# Altium PCB PCB1.PcbDoc (part 12 of 12)
Units mm, origin at the board's own origin, x right, y up, seen from the top; angles counter-clockwise.
Board outline 122.17 x 121.67 mm, 2 copper layers (Top Layer, Bottom Layer); 274 components, 225 nets, 941 pads, 421 vias.
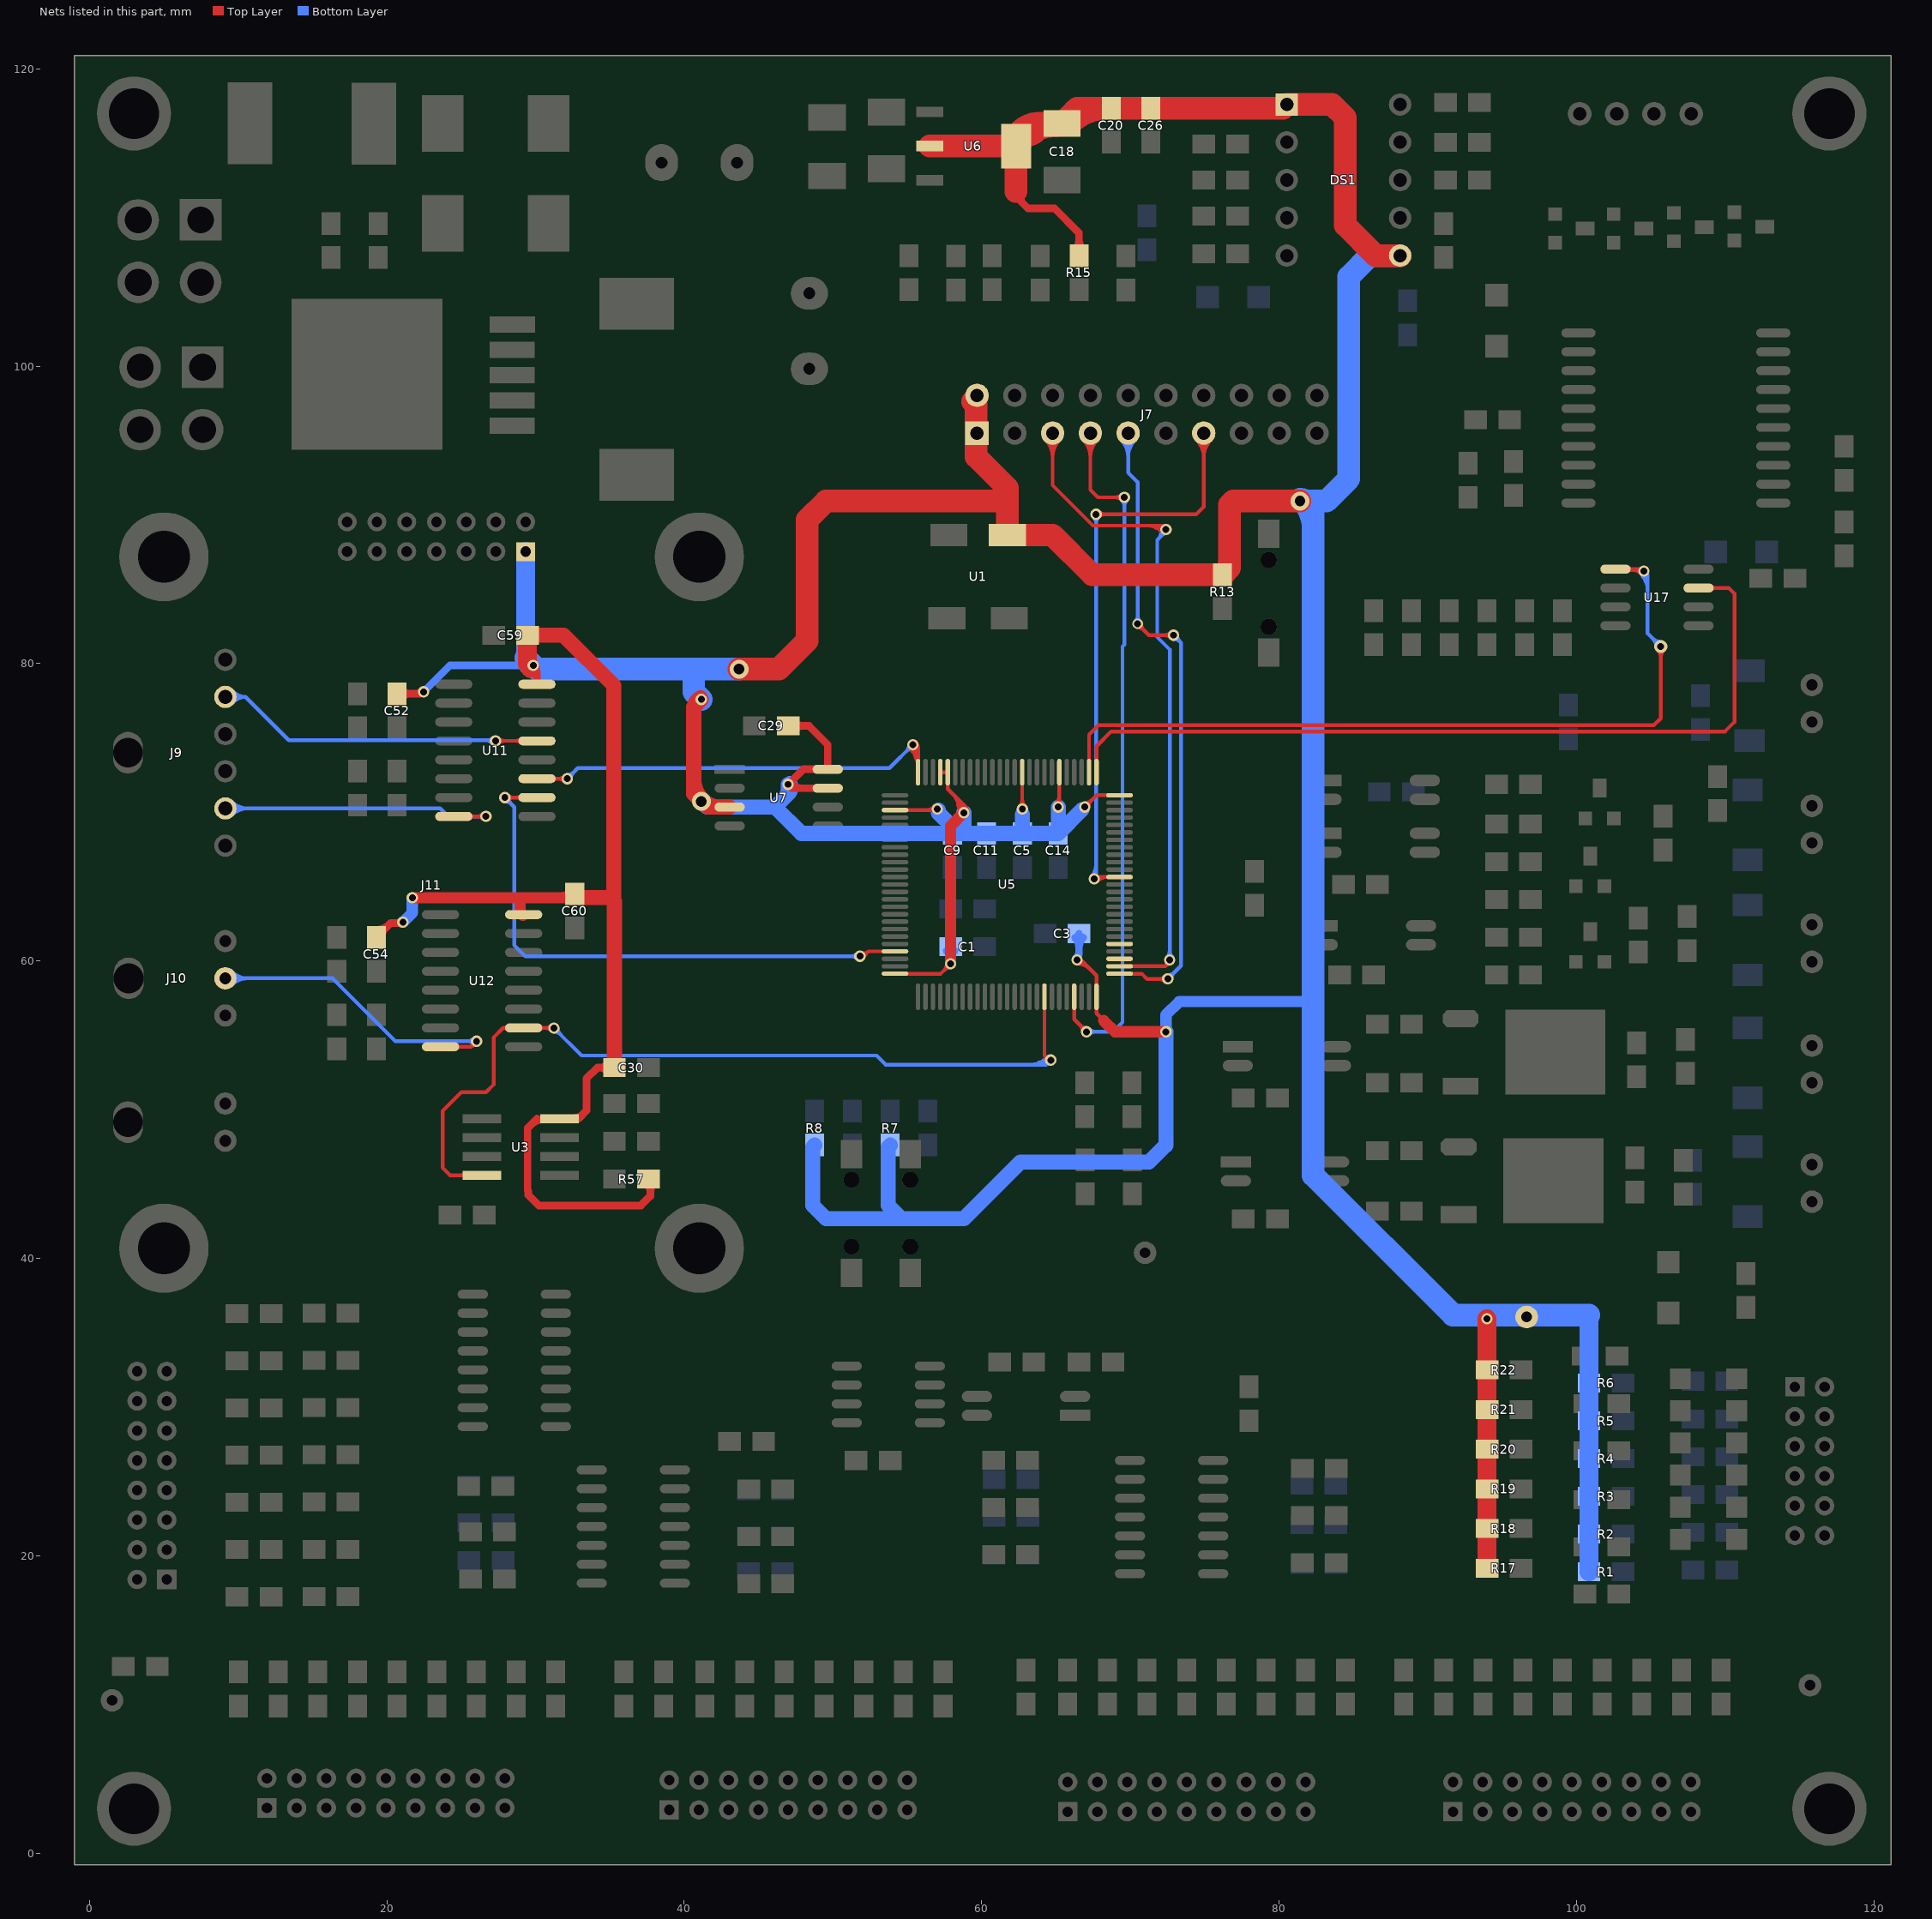
[diagram p12: the nets of this part, all layers, seen from the top]

## Via types
v1: diameter 0.762, hole 0.457, Top Layer to Bottom Layer, 339 vias
v2: diameter 1.27, hole 0.457, Top Layer to Bottom Layer, 39 vias
v3: diameter 0.889, hole 0.457, Top Layer to Bottom Layer, 21 vias
v4: diameter 1.27, hole 0.711, Top Layer to Bottom Layer, 12 vias
v5: diameter 1.524, hole 0.711, Top Layer to Bottom Layer, 5 vias
v6: diameter 1.016, hole 0.457, Top Layer to Bottom Layer, 3 vias
v7: diameter 0.711, hole 0.457, Top Layer to Bottom Layer, 1 vias
v8: diameter 1.524, hole 0.457, Top Layer to Bottom Layer, 1 vias

## Nets (pads, with @x,y where several pads share a name; then routed paths per layer and width w, separated by ;. In a path a pad name is that pad's centre, name@x,y a point inside that pad or via, vN(x,y) a via of type N, cw(c..) or ccw(c..) an arc to the next point about the centre after c; other vN are vias at no path point) (continued)
TCK: J7.9 U5.76 | length 86.5
  Top Layer w0.254: U5.76@69.272,59.151 70.77,59.151 71.12,58.801 v1(72.517,58.801) ; v7(70.485,82.677) 71.247,81.915 v1(72.898,81.915) ; v7@70.46,82.672 ccw(c70.831,82.748) 70.733,82.382 ; v7@70.46,82.672 ccw(c70.831,82.748) 70.733,82.382 ; v7@70.46,82.672 ccw(c70.831,82.748) 70.733,82.382 ; v7@70.46,82.672 ccw(c70.831,82.748) 70.733,82.382 ; v7@70.46,82.672 ccw(c70.831,82.748) 70.733,82.382 ; v7@70.46,82.672 ccw(c70.831,82.748) 70.733,82.382 ; v7@70.485,82.448 cw(c70.485,81.897) 70.875,82.287 ; v7@70.485,82.448 cw(c70.485,81.897) 70.875,82.287 ; v7@70.485,82.448 cw(c70.485,81.897) 70.875,82.287 ; v7@70.485,82.448 cw(c70.485,81.897) 70.875,82.287 ; v7@70.49,82.702 cw(c70.414,82.331) 70.78,82.429 ; v7@70.49,82.702 cw(c70.414,82.331) 70.78,82.429 ; v7@70.49,82.702 cw(c70.414,82.331) 70.78,82.429 ; v7@70.49,82.702 cw(c70.414,82.331) 70.78,82.429 ; v7@70.49,82.702 cw(c70.414,82.331) 70.78,82.429 ; v7@70.49,82.702 cw(c70.414,82.331) 70.78,82.429 ; v7@70.714,82.677 ccw(c71.265,82.677) 70.875,82.287 ; v7@70.714,82.677 ccw(c71.265,82.677) 70.875,82.287 ; v7@70.714,82.677 ccw(c71.265,82.677) 70.875,82.287 ; v7@70.714,82.677 ccw(c71.265,82.677) 70.875,82.287 ; 71.904,58.801 cw(c71.904,58.188) v1@72.337,58.621 ; 71.904,58.801 ccw(c71.904,59.414) v1@72.337,58.981 ; 71.904,58.801 cw(c71.904,58.188) v1@72.337,58.621 ; 71.904,58.801 ccw(c71.904,59.414) v1@72.337,58.981 ; 71.904,58.801 cw(c71.904,58.188) v1@72.337,58.621 ; 71.904,58.801 ccw(c71.904,59.414) v1@72.337,58.981 ; 71.904,58.801 cw(c71.904,58.188) v1@72.337,58.621 ; 71.904,58.801 ccw(c71.904,59.414) v1@72.337,58.981 ; 72.285,81.915 cw(c72.285,81.302) v1@72.718,81.735 ; 72.285,81.915 ccw(c72.285,82.528) v1@72.718,82.095 ; 72.285,81.915 cw(c72.285,81.302) v1@72.718,81.735 ; 72.285,81.915 ccw(c72.285,82.528) v1@72.718,82.095 ; 72.285,81.915 cw(c72.285,81.302) v1@72.718,81.735 ; 72.285,81.915 ccw(c72.285,82.528) v1@72.718,82.095 ; 72.285,81.915 cw(c72.285,81.302) v1@72.718,81.735 ; 72.285,81.915 ccw(c72.285,82.528) v1@72.718,82.095
  Bottom Layer w0.254: J7.9@69.85,95.504 69.85,92.837 70.485,92.202 v7(70.485,82.677) ; v1(72.517,58.801) 73.406,59.69 73.406,81.407 v1(72.898,81.915) ; J7.9@69.383,95.037 cw(c68.256,93.91) 69.85,93.91 ; J7.9@69.383,95.037 cw(c68.256,93.91) 69.85,93.91 ; J7.9@69.383,95.037 cw(c68.256,93.91) 69.85,93.91 ; J7.9@69.383,95.037 cw(c68.256,93.91) 69.85,93.91 ; J7.9@69.563,95.217 cw(c68.869,94.523) 69.85,94.523 ; J7.9@69.563,95.217 cw(c68.869,94.523) 69.85,94.523 ; J7.9@69.563,95.217 cw(c68.869,94.523) 69.85,94.523 ; J7.9@69.563,95.217 cw(c68.869,94.523) 69.85,94.523 ; 69.85,93.91 cw(c71.444,93.91) J7.9@70.317,95.037 ; 69.85,93.91 cw(c71.444,93.91) J7.9@70.317,95.037 ; 69.85,93.91 cw(c71.444,93.91) J7.9@70.317,95.037 ; 69.85,93.91 cw(c71.444,93.91) J7.9@70.317,95.037 ; 69.85,94.523 cw(c70.831,94.523) J7.9@70.137,95.217 ; 69.85,94.523 cw(c70.831,94.523) J7.9@70.137,95.217 ; 69.85,94.523 cw(c70.831,94.523) J7.9@70.137,95.217 ; 69.85,94.523 cw(c70.831,94.523) J7.9@70.137,95.217 ; v7@70.323,82.839 ccw(c69.933,83.229) 70.485,83.229 ; v7@70.323,82.839 ccw(c69.933,83.229) 70.485,83.229 ; v7@70.323,82.839 ccw(c69.933,83.229) 70.485,83.229 ; v7@70.323,82.839 ccw(c69.933,83.229) 70.485,83.229 ; 70.485,83.229 ccw(c71.037,83.229) v7@70.647,82.839 ; 70.485,83.229 ccw(c71.037,83.229) v7@70.647,82.839 ; 70.485,83.229 ccw(c71.037,83.229) v7@70.647,82.839 ; 70.485,83.229 ccw(c71.037,83.229) v7@70.647,82.839 ; v1@72.517,59.055 ccw(c72.517,59.668) 72.951,59.235 ; v1@72.517,59.055 ccw(c72.517,59.668) 72.951,59.235 ; v1@72.517,59.055 ccw(c72.517,59.668) 72.951,59.235 ; v1@72.517,59.055 ccw(c72.517,59.668) 72.951,59.235 ; v1@72.771,58.801 cw(c73.384,58.801) 72.951,59.235 ; v1@72.771,58.801 cw(c73.384,58.801) 72.951,59.235 ; v1@72.771,58.801 cw(c73.384,58.801) 72.951,59.235 ; v1@72.771,58.801 cw(c73.384,58.801) 72.951,59.235 ; v1@72.898,81.661 cw(c72.898,81.048) 73.332,81.481 ; v1@72.898,81.661 cw(c72.898,81.048) 73.332,81.481 ; v1@72.898,81.661 cw(c72.898,81.048) 73.332,81.481 ; v1@72.898,81.661 cw(c72.898,81.048) 73.332,81.481 ; v1@73.152,81.915 ccw(c73.765,81.915) 73.332,81.481 ; v1@73.152,81.915 ccw(c73.765,81.915) 73.332,81.481 ; v1@73.152,81.915 ccw(c73.765,81.915) 73.332,81.481 ; v1@73.152,81.915 ccw(c73.765,81.915) 73.332,81.481
TDI: J7.5 U5.77 | length 91.9
  Top Layer w0.254: J7.5@64.77,95.504 64.77,91.994 67.483,89.281 72.136,89.281 v1(72.39,89.027) ; U5.77@69.272,59.651 72.351,59.651 ; v1(72.644,60.071) 72.771,60.071 72.351,59.651 ; J7.5@64.303,95.037 cw(c63.176,93.91) 64.77,93.91 ; J7.5@64.303,95.037 cw(c63.176,93.91) 64.77,93.91 ; J7.5@64.303,95.037 cw(c63.176,93.91) 64.77,93.91 ; J7.5@64.303,95.037 cw(c63.176,93.91) 64.77,93.91 ; J7.5@64.483,95.217 cw(c63.789,94.523) 64.77,94.523 ; J7.5@64.483,95.217 cw(c63.789,94.523) 64.77,94.523 ; J7.5@64.483,95.217 cw(c63.789,94.523) 64.77,94.523 ; J7.5@64.483,95.217 cw(c63.789,94.523) 64.77,94.523 ; 64.77,93.91 cw(c66.364,93.91) J7.5@65.237,95.037 ; 64.77,93.91 cw(c66.364,93.91) J7.5@65.237,95.037 ; 64.77,93.91 cw(c66.364,93.91) J7.5@65.237,95.037 ; 64.77,93.91 cw(c66.364,93.91) J7.5@65.237,95.037 ; 64.77,94.523 cw(c65.751,94.523) J7.5@65.057,95.217 ; 64.77,94.523 cw(c65.751,94.523) J7.5@65.057,95.217 ; 64.77,94.523 cw(c65.751,94.523) J7.5@65.057,95.217 ; 64.77,94.523 cw(c65.751,94.523) J7.5@65.057,95.217 ; 71.164,89.281 cw(c71.164,87.801) v1@72.21,88.847 ; 71.164,89.281 cw(c71.164,87.801) v1@72.21,88.847 ; 71.164,89.281 cw(c71.164,87.801) v1@72.21,88.847 ; 71.164,89.281 cw(c71.164,87.801) v1@72.21,88.847 ; 71.669,89.16 ccw(c71.906,89.569) v1@72.221,89.216 ; 71.669,89.16 ccw(c71.906,89.569) v1@72.221,89.216 ; 71.669,89.16 ccw(c71.906,89.569) v1@72.221,89.216 ; 71.669,89.16 ccw(c71.906,89.569) v1@72.221,89.216 ; 71.669,89.16 ccw(c71.906,89.569) v1@72.221,89.216 ; 71.669,89.16 ccw(c71.906,89.569) v1@72.221,89.216 ; 71.777,89.281 cw(c71.777,88.414) v1(72.39,89.027) ; 71.777,89.281 cw(c71.777,88.414) v1(72.39,89.027) ; 71.777,89.281 cw(c71.777,88.414) v1(72.39,89.027) ; 71.777,89.281 cw(c71.777,88.414) v1(72.39,89.027) ; 71.974,88.984 ccw(c72.152,89.293) v1(72.39,89.027) ; 71.974,88.984 ccw(c72.152,89.293) v1(72.39,89.027) ; 71.974,88.984 ccw(c72.152,89.293) v1(72.39,89.027) ; 71.974,88.984 ccw(c72.152,89.293) v1(72.39,89.027) ; 71.974,88.984 ccw(c72.152,89.293) v1(72.39,89.027) ; 71.974,88.984 ccw(c72.152,89.293) v1(72.39,89.027) ; 72.001,89.251 cw(c71.866,89.018) v1@72.136,89.023 ; 72.001,89.251 ccw(c72.136,89.485) v1@72.267,89.249 ; 72.001,89.251 cw(c71.866,89.018) v1@72.136,89.023 ; 72.001,89.251 ccw(c72.136,89.485) v1@72.267,89.249 ; 72.001,89.251 cw(c71.866,89.018) v1@72.136,89.023 ; 72.001,89.251 ccw(c72.136,89.485) v1@72.267,89.249 ; 72.001,89.251 cw(c71.866,89.018) v1@72.136,89.023 ; 72.001,89.251 ccw(c72.136,89.485) v1@72.267,89.249 ; 72.001,89.251 cw(c71.866,89.018) v1@72.136,89.023 ; 72.001,89.251 ccw(c72.136,89.485) v1@72.267,89.249 ; 72.001,89.251 cw(c71.866,89.018) v1@72.136,89.023 ; 72.001,89.251 ccw(c72.136,89.485) v1@72.267,89.249 ; 72.351,59.651 ccw(c72.148,59.854) v1@72.411,59.969 ; 72.351,59.651 ccw(c72.148,59.854) v1@72.411,59.969 ; 72.351,59.651 ccw(c72.148,59.854) v1@72.411,59.969 ; 72.351,59.651 ccw(c72.148,59.854) v1@72.411,59.969 ; 72.427,59.727 cw(c72.644,59.51) v1@72.644,59.817 ; 72.427,59.727 cw(c72.644,59.51) v1@72.644,59.817 ; 72.427,59.727 cw(c72.644,59.51) v1@72.644,59.817 ; 72.427,59.727 cw(c72.644,59.51) v1@72.644,59.817
  Bottom Layer w0.254: v1@72.263,88.773 71.806,88.316 71.806,81.788 72.644,80.95 v1(72.644,60.071) ; 71.867,88.377 ccw(c71.216,89.027) v1@72.136,89.027 ; 71.867,88.377 ccw(c71.216,89.027) v1@72.136,89.027 ; 71.867,88.377 ccw(c71.216,89.027) v1@72.136,89.027 ; 71.867,88.377 ccw(c71.216,89.027) v1@72.136,89.027 ; 72.03,88.632 cw(c72.593,88.481) v1(72.39,89.027) ; 72.03,88.632 cw(c72.593,88.481) v1(72.39,89.027) ; 72.03,88.632 cw(c72.593,88.481) v1(72.39,89.027) ; 72.03,88.632 cw(c72.593,88.481) v1(72.39,89.027) ; 72.03,88.632 cw(c72.593,88.481) v1(72.39,89.027) ; 72.03,88.632 cw(c72.593,88.481) v1(72.39,89.027) ; 72.173,88.683 cw(c72.39,88.466) v1@72.39,88.773 ; 72.173,88.683 cw(c72.39,88.466) v1@72.39,88.773 ; 72.173,88.683 cw(c72.39,88.466) v1@72.39,88.773 ; 72.173,88.683 cw(c72.39,88.466) v1@72.39,88.773 ; v1@72.464,60.251 ccw(c72.031,60.684) 72.644,60.684 ; v1@72.464,60.251 ccw(c72.031,60.684) 72.644,60.684 ; v1@72.464,60.251 ccw(c72.031,60.684) 72.644,60.684 ; v1@72.464,60.251 ccw(c72.031,60.684) 72.644,60.684 ; 72.644,60.684 ccw(c73.257,60.684) v1@72.824,60.251 ; 72.644,60.684 ccw(c73.257,60.684) v1@72.824,60.251 ; 72.644,60.684 ccw(c73.257,60.684) v1@72.824,60.251 ; 72.644,60.684 ccw(c73.257,60.684) v1@72.824,60.251
TDO: J7.13 U5.89 | length 61.5
  Top Layer w0.254: v1(67.564,65.532) 67.683,65.651 U5.89@69.272,65.651 ; v1(67.691,90.043) 74.422,90.043 74.93,90.551 J7.13@74.93,95.504 ; v1@67.744,65.352 cw(c68.464,64.632) U5.89@68.464,65.651 ; v1@67.744,65.352 cw(c68.464,64.632) U5.89@68.464,65.651 ; v1@67.744,65.352 cw(c68.464,64.632) U5.89@68.464,65.651 ; v1@67.871,89.863 cw(c68.304,89.43) 68.304,90.043 ; v1@67.871,89.863 cw(c68.304,89.43) 68.304,90.043 ; v1@67.871,89.863 cw(c68.304,89.43) 68.304,90.043 ; v1@67.871,90.223 ccw(c68.304,90.656) 68.304,90.043 ; v1@67.871,90.223 ccw(c68.304,90.656) 68.304,90.043 ; v1@67.871,90.223 ccw(c68.304,90.656) 68.304,90.043 ; J7.13@74.463,95.037 cw(c73.336,93.91) 74.93,93.91 ; J7.13@74.463,95.037 cw(c73.336,93.91) 74.93,93.91 ; J7.13@74.463,95.037 cw(c73.336,93.91) 74.93,93.91 ; J7.13@74.643,95.217 cw(c73.949,94.523) 74.93,94.523 ; J7.13@74.643,95.217 cw(c73.949,94.523) 74.93,94.523 ; J7.13@74.643,95.217 cw(c73.949,94.523) 74.93,94.523 ; 74.93,93.91 cw(c76.524,93.91) J7.13@75.397,95.037 ; 74.93,93.91 cw(c76.524,93.91) J7.13@75.397,95.037 ; 74.93,93.91 cw(c76.524,93.91) J7.13@75.397,95.037 ; 74.93,94.523 cw(c75.911,94.523) J7.13@75.217,95.217 ; 74.93,94.523 cw(c75.911,94.523) J7.13@75.217,95.217 ; 74.93,94.523 cw(c75.911,94.523) J7.13@75.217,95.217
  Bottom Layer w0.254: v1(67.564,65.532) 67.691,65.659 v1(67.691,90.043) ; v1@67.384,65.712 ccw(c66.644,66.452) 67.691,66.452 ; v1@67.384,65.712 ccw(c66.644,66.452) 67.691,66.452 ; v1@67.384,65.712 ccw(c66.644,66.452) 67.691,66.452 ; v1@67.511,89.863 cw(c67.078,89.43) 67.691,89.43 ; v1@67.511,89.863 cw(c67.078,89.43) 67.691,89.43 ; v1@67.511,89.863 cw(c67.078,89.43) 67.691,89.43 ; 67.691,89.43 cw(c68.304,89.43) v1@67.871,89.863 ; 67.691,89.43 cw(c68.304,89.43) v1@67.871,89.863 ; 67.691,89.43 cw(c68.304,89.43) v1@67.871,89.863
TMS: J7.7 U5.72 | length 73.7
  Top Layer w0.254: U5.72@66.222,57.601 66.222,56.079 v1(67.056,55.245) ; J7.7@67.31,95.504 67.31,91.694 67.818,91.186 v1(69.596,91.186) ; 66.622,55.679 cw(c66.189,55.245) v1@66.802,55.245 ; 66.622,55.679 ccw(c67.056,56.112) v1@67.056,55.499 ; 66.622,55.679 cw(c66.189,55.245) v1@66.802,55.245 ; 66.622,55.679 ccw(c67.056,56.112) v1@67.056,55.499 ; 66.622,55.679 cw(c66.189,55.245) v1@66.802,55.245 ; 66.622,55.679 ccw(c67.056,56.112) v1@67.056,55.499 ; 66.716,55.565 ccw(c67.145,55.68) v1(67.056,55.245) ; 66.716,55.565 ccw(c67.145,55.68) v1(67.056,55.245) ; 66.716,55.565 ccw(c67.145,55.68) v1(67.056,55.245) ; 66.736,55.585 cw(c66.621,55.156) v1(67.056,55.245) ; 66.736,55.585 cw(c66.621,55.156) v1(67.056,55.245) ; 66.736,55.585 cw(c66.621,55.156) v1(67.056,55.245) ; J7.7@66.843,95.037 cw(c65.716,93.91) 67.31,93.91 ; J7.7@66.843,95.037 cw(c65.716,93.91) 67.31,93.91 ; J7.7@66.843,95.037 cw(c65.716,93.91) 67.31,93.91 ; J7.7@67.023,95.217 cw(c66.329,94.523) 67.31,94.523 ; J7.7@67.023,95.217 cw(c66.329,94.523) 67.31,94.523 ; J7.7@67.023,95.217 cw(c66.329,94.523) 67.31,94.523 ; 67.31,93.91 cw(c68.904,93.91) J7.7@67.777,95.037 ; 67.31,93.91 cw(c68.904,93.91) J7.7@67.777,95.037 ; 67.31,93.91 cw(c68.904,93.91) J7.7@67.777,95.037 ; 67.31,94.523 cw(c68.291,94.523) J7.7@67.597,95.217 ; 67.31,94.523 cw(c68.291,94.523) J7.7@67.597,95.217 ; 67.31,94.523 cw(c68.291,94.523) J7.7@67.597,95.217 ; 68.983,91.186 cw(c68.983,90.573) v1@69.416,91.006 ; 68.983,91.186 ccw(c68.983,91.799) v1@69.416,91.366 ; 68.983,91.186 cw(c68.983,90.573) v1@69.416,91.006 ; 68.983,91.186 ccw(c68.983,91.799) v1@69.416,91.366 ; 68.983,91.186 cw(c68.983,90.573) v1@69.416,91.006 ; 68.983,91.186 ccw(c68.983,91.799) v1@69.416,91.366
  Bottom Layer w0.254: v1(67.056,55.245) 68.834,55.245 69.469,55.88 69.469,81.153 69.596,81.28 v1(69.596,91.186) ; v1@67.236,55.065 cw(c67.669,54.632) 67.669,55.245 ; v1@67.236,55.065 cw(c67.669,54.632) 67.669,55.245 ; v1@67.236,55.065 cw(c67.669,54.632) 67.669,55.245 ; v1@67.236,55.425 ccw(c67.669,55.858) 67.669,55.245 ; v1@67.236,55.425 ccw(c67.669,55.858) 67.669,55.245 ; v1@67.236,55.425 ccw(c67.669,55.858) 67.669,55.245 ; v1@69.416,91.006 cw(c68.983,90.573) 69.596,90.573 ; v1@69.416,91.006 cw(c68.983,90.573) 69.596,90.573 ; v1@69.416,91.006 cw(c68.983,90.573) 69.596,90.573 ; 69.596,90.573 cw(c70.209,90.573) v1@69.776,91.006 ; 69.596,90.573 cw(c70.209,90.573) v1@69.776,91.006 ; 69.596,90.573 cw(c70.209,90.573) v1@69.776,91.006
TXD1: U3.4 U5.68 U12.10 | length 71.7
  Top Layer w0.254: U3.4@25.284,45.471 ccw(c24.989,45.175) 24.989,45.593 ccw(c24.989,46.011) U3.4@25.284,45.715 ; U3.4@26.407,45.593 24.257,45.593 23.749,46.101 23.749,49.911 25.019,51.181 26.67,51.181 27.178,51.689 27.178,54.864 27.82,55.506 U12.10@29.201,55.506 31.235,55.506 v1(31.242,55.499) ; U5.68@64.222,57.601 64.222,53.634 ; v1@64.389,53.467 64.222,53.634 ; 27.827,55.506 cw(c27.827,55.077) 28.13,55.38 ccw(c27.827,55.077) 27.827,55.506 ; 27.827,55.506 ccw(c27.827,55.935) 28.13,55.632 cw(c27.827,55.935) 27.827,55.506 ; 30.576,55.506 cw(c30.576,55.935) 30.272,55.632 ccw(c30.576,55.935) 30.576,55.506 ; 30.576,55.506 ccw(c30.576,55.077) 30.272,55.38 cw(c30.576,55.077) 30.576,55.506 ; 64.222,53.634 ccw(c64.427,53.839) 64.542,53.573 cw(c64.427,53.839) 64.222,53.634 ; 30.611,55.506 cw(c30.611,54.868) 31.062,55.319 ccw(c30.611,54.868) 30.611,55.506 ; 30.646,55.506 ccw(c30.646,56.095) 31.062,55.679 cw(c30.646,56.095) 30.646,55.506 ; 64.299,53.557 cw(c64.082,53.34) 64.389,53.34 ccw(c64.082,53.34) 64.299,53.557
  Bottom Layer w0.254: v1(31.242,55.499) 33.096,53.645 52.933,53.645 53.542,53.035 64.338,53.035 v1(64.643,53.34) ; 63.845,53.162 cw(c64.147,52.638) v1@64.496,53.133 ; 64.188,53.361 cw(c64.399,52.995) v1(64.643,53.34) ; v1@64.392,53.382 cw(c63.954,53.455) 64.177,53.071 cw(c64.399,52.686) v1@64.554,53.102 ; 31.676,55.065 cw(c32.109,55.499) 31.496,55.499 ccw(c32.109,55.499) 31.676,55.065 ; 31.676,55.065 ccw(c31.242,54.632) 31.242,55.245 cw(c31.242,54.632) 31.676,55.065 ; v1(64.643,53.34) cw(c63.907,54.076) 63.907,53.035 ccw(c63.907,54.076) v1(64.643,53.34) ; 63.294,53.035 ccw(c63.294,54.689) 64.463,53.52 cw(c63.294,54.689) 63.294,53.035
TXD2: U5.25 U11.11 | length 44.4
  Top Layer w0.254: U11.11@30.095,72.267 32.127,72.267 v1(32.131,72.263) ; v1@55.306,74.304 cw(c55.148,73.711) 55.679,74.018 cw(c56.21,74.325) v1@55.617,74.483 ; 55.371,74.06 cw(c55.792,74.304) v1(55.372,74.549) ; 55.559,73.698 ccw(c55.92,73.795) U5.25@55.733,73.471 ; 55.59,73.682 cw(c56.227,74.05) v1@55.591,74.421 ; U5.25@55.722,72.701 55.722,74.199 ; 31.469,72.267 cw(c31.469,72.696) 31.166,72.392 ccw(c31.469,72.696) 31.469,72.267 ; 31.469,72.267 ccw(c31.469,71.837) 31.166,72.141 cw(c31.469,71.837) 31.469,72.267 ; v1(55.372,74.549) cw(c54.527,73.704) 55.722,73.704 ccw(c54.527,73.704) v1(55.372,74.549) ; v1(55.372,74.549) 55.722,74.199 ; 55.722,74.199 cw(c55.973,74.45) 55.623,74.508 ccw(c55.973,74.45) 55.722,74.199 ; 55.722,74.199 ccw(c55.471,73.948) 55.413,74.298 cw(c55.471,73.948) 55.722,74.199 ; 31.509,72.267 cw(c31.509,71.641) 31.951,72.083 ccw(c31.509,71.641) 31.509,72.267 ; 31.526,72.267 ccw(c31.526,72.868) 31.951,72.443 cw(c31.526,72.868) 31.526,72.267 ; v1@55.192,74.369 cw(c53.914,73.091) 55.722,73.091 ccw(c53.914,73.091) v1@55.192,74.369 ; v1@55.552,74.729 cw(c55.14,74.317) 55.722,74.317 ccw(c55.14,74.317) v1@55.552,74.729
  Bottom Layer w0.254: 32.448,72.581 32.842,72.974 53.797,72.974 v1(55.372,74.549) ; 32.565,72.697 cw(c32.131,73.13) 32.131,72.517 ccw(c32.131,73.13) 32.565,72.697 ; 32.565,72.697 ccw(c32.998,72.263) 32.385,72.263 cw(c32.998,72.263) 32.565,72.697 ; 54.938,74.115 cw(c55.372,73.682) 55.372,74.295 ccw(c55.372,73.682) 54.938,74.115 ; 54.938,74.115 ccw(c54.505,74.549) 55.118,74.549 cw(c54.505,74.549) 54.938,74.115
TXD3: U5.47 U11.10 | length 46.3
  Top Layer w0.254: v1(27.94,70.993) 30.091,70.993 U11.10@30.095,70.997 ; v1@52.07,60.325 52.396,60.651 ; U5.47@54.172,60.651 52.396,60.651 ; 28.553,70.993 cw(c28.553,71.606) 28.12,71.173 ccw(c28.553,71.606) 28.553,70.993 ; 28.553,70.993 ccw(c28.553,70.38) 28.12,70.813 cw(c28.553,70.38) 28.553,70.993 ; 52.396,60.651 cw(c52.088,60.959) 51.916,60.558 ccw(c52.088,60.959) 52.396,60.651 ; 28.712,70.993 ccw(c28.712,71.435) 29.024,71.122 cw(c28.712,71.435) 28.712,70.993 ; 28.729,70.993 cw(c28.729,70.576) 29.024,70.871 ccw(c28.729,70.576) 28.729,70.993
  Bottom Layer w0.254: v1(27.94,70.993) 28.575,70.358 28.575,61.063 29.313,60.325 v1(51.816,60.325) ; 28.374,70.559 cw(c28.807,70.993) 28.194,70.993 ccw(c28.807,70.993) 28.374,70.559 ; 28.374,70.559 ccw(c27.94,70.126) 27.94,70.739 cw(c27.94,70.126) 28.374,70.559 ; 51.203,60.325 cw(c51.203,59.712) 51.636,60.145 ccw(c51.203,59.712) 51.203,60.325 ; 51.203,60.325 ccw(c51.203,60.938) 51.636,60.505 cw(c51.203,60.938) 51.203,60.325
TXD4: U5.78
TXD5: U5.80
TXD_M1: J10.2 U12.8 | length 36
  Top Layer w0.254: U12.8@23.618,54.233 25.658,54.233 ; v1(26.035,54.61) 25.658,54.233 ; U12.8@24.684,54.11 cw(c24.979,53.816) 24.979,54.233 ; U12.8@24.684,54.11 cw(c24.979,53.816) 24.979,54.233 ; U12.8@24.684,54.11 cw(c24.979,53.816) 24.979,54.233 ; U12.8@24.684,54.362 ccw(c24.996,54.674) 24.996,54.233 ; U12.8@24.684,54.362 ccw(c24.996,54.674) 24.996,54.233 ; U12.8@24.684,54.362 ccw(c24.996,54.674) 24.996,54.233 ; 25.658,54.233 cw(c25.964,53.926) v1@26.009,54.357 ; 25.658,54.233 ccw(c25.351,54.539) v1@25.782,54.584 ; 25.658,54.233 cw(c25.964,53.926) v1@26.009,54.357 ; 25.658,54.233 ccw(c25.351,54.539) v1@25.782,54.584 ; 25.658,54.233 cw(c25.964,53.926) v1@26.009,54.357 ; 25.658,54.233 ccw(c25.351,54.539) v1@25.782,54.584
  Bottom Layer w0.254: J10.2@9.144,58.841 16.343,58.841 20.574,54.61 v1(26.035,54.61) ; 10.035,58.841 cw(c10.035,59.732) 9.405,59.102 ccw(c10.035,59.732) 10.035,58.841 ; 10.035,58.841 ccw(c10.035,57.95) 9.405,58.58 cw(c10.035,57.95) 10.035,58.841 ; 10.648,58.841 cw(c10.648,60.345) 9.585,59.282 ccw(c10.648,60.345) 10.648,58.841 ; 10.648,58.841 ccw(c10.648,57.337) 9.585,58.4 cw(c10.648,57.337) 10.648,58.841 ; 25.422,54.61 cw(c25.422,53.997) v1@25.855,54.43 ; 25.422,54.61 ccw(c25.422,55.223) v1@25.855,54.79 ; 25.422,54.61 cw(c25.422,53.997) v1@25.855,54.43 ; 25.422,54.61 ccw(c25.422,55.223) v1@25.855,54.79 ; 25.422,54.61 cw(c25.422,53.997) v1@25.855,54.43 ; 25.422,54.61 ccw(c25.422,55.223) v1@25.855,54.79
TXD_M2: J9.2 U11.13 | length 36.8
  Top Layer w0.254: v1@27.305,74.803 v1(27.309,74.807) U11.13@30.095,74.807 ; v1@27.488,74.627 cw(c27.922,74.193) 27.922,74.807 ; v1@27.488,74.627 cw(c27.922,74.193) 27.922,74.807 ; v1@27.488,74.627 cw(c27.922,74.193) 27.922,74.807 ; v1@27.488,74.986 ccw(c27.922,75.42) 27.922,74.807 ; v1@27.488,74.986 ccw(c27.922,75.42) 27.922,74.807 ; v1@27.488,74.986 ccw(c27.922,75.42) 27.922,74.807 ; 28.72,74.807 cw(c28.72,74.377) U11.13@29.024,74.681 ; 28.72,74.807 ccw(c28.72,75.236) U11.13@29.024,74.932 ; 28.72,74.807 cw(c28.72,74.377) U11.13@29.024,74.681 ; 28.72,74.807 ccw(c28.72,75.236) U11.13@29.024,74.932 ; 28.72,74.807 cw(c28.72,74.377) U11.13@29.024,74.681 ; 28.72,74.807 ccw(c28.72,75.236) U11.13@29.024,74.932
  Bottom Layer w0.254: J9.2@9.271,77.764 10.501,77.764 13.411,74.854 26.809,74.854 ; v1@27.261,74.854 v1(27.309,74.807) ; 9.948,77.764 cw(c9.948,78.455) 9.424,78.005 ccw(c9.948,78.455) 9.948,77.764 ; 9.948,77.764 ccw(c9.948,77.073) 9.424,77.523 cw(c9.948,77.073) 9.948,77.764 ; 10.501,77.764 cw(c10.501,78.93) 9.616,78.17 ccw(c10.501,78.93) 10.501,77.764 ; 10.501,77.764 ccw(c10.501,76.598) 9.616,77.358 cw(c10.501,76.598) 10.501,77.764 ; 26.581,74.854 cw(c26.581,74.079) v1@27.129,74.627 ; 26.581,74.854 cw(c26.581,74.079) v1@27.129,74.627 ; 26.581,74.854 cw(c26.581,74.079) v1@27.129,74.627 ; 26.809,74.854 ccw(c26.809,75.306) v1@27.129,74.986 ; 26.809,74.854 cw(c26.809,74.543) 27.084,74.688 ccw(c26.809,74.543) 26.809,74.854 ; 26.809,74.854 ccw(c26.809,75.306) v1@27.129,74.986 ; 26.809,74.854 ccw(c26.809,75.306) v1@27.129,74.986 ; 26.809,74.854 ccw(c26.809,75.306) v1@27.129,74.986
TXD_M3: J9.5 U11.8 | length 32.8
  Top Layer w0.254: U11.8@24.507,69.727 v1(26.666,69.727) ; U11.8@25.578,69.852 ccw(c25.881,70.156) 25.881,69.727 ; U11.8@25.578,69.852 ccw(c25.881,70.156) 25.881,69.727 ; U11.8@25.578,69.852 ccw(c25.881,70.156) 25.881,69.727 ; 25.881,69.727 ccw(c25.881,69.297) 25.578,69.601 cw(c25.881,69.297) 25.881,69.727 ; 26.053,69.727 cw(c26.053,69.113) 26.487,69.547 ccw(c26.053,69.113) 26.053,69.727 ; 26.053,69.727 ccw(c26.053,70.34) 26.487,69.906 cw(c26.053,70.34) 26.053,69.727
  Bottom Layer w0.254: J9.5@9.271,70.264 23.593,70.264 24.13,69.727 v1(26.666,69.727) ; 10.035,70.264 cw(c10.035,71.155) 9.405,70.525 ccw(c10.035,71.155) 10.035,70.264 ; 10.035,70.264 ccw(c10.035,69.373) 9.405,70.003 cw(c10.035,69.373) 10.035,70.264 ; 10.648,70.264 cw(c10.648,71.768) 9.585,70.705 ccw(c10.648,71.768) 10.648,70.264 ; 10.648,70.264 ccw(c10.648,68.76) 9.585,69.823 cw(c10.648,68.76) 10.648,70.264 ; 26.053,69.727 cw(c26.053,69.113) 26.487,69.547 ccw(c26.053,69.113) 26.053,69.727 ; 26.053,69.727 ccw(c26.053,70.34) 26.487,69.906 cw(c26.053,70.34) 26.053,69.727
V_CHECK_1: U5.2 U17.1 | length 87.2
  Top Layer w0.254: U5.2@67.222,72.701 67.222,75.223 67.869,75.87 104.445,75.87 105.207,75.87 105.664,76.327 v3(105.664,81.153) v3@105.664,81.28 ; U17.1@102.616,86.36 104.394,86.36 v1(104.521,86.233) ; U17.1@103.416,86.206 cw(c103.752,85.625) 103.926,86.273 ; U17.1@103.416,86.206 cw(c103.752,85.625) 103.926,86.273 ; U17.1@103.416,86.206 cw(c103.752,85.625) 103.926,86.273 ; U17.1@103.416,86.206 cw(c103.752,85.625) 103.926,86.273 ; U17.1@103.416,86.206 cw(c103.752,85.625) 103.926,86.273 ; U17.1@103.416,86.206 cw(c103.752,85.625) 103.926,86.273 ; U17.1@103.453,86.234 cw(c103.756,85.931) 103.756,86.36 ; U17.1@103.453,86.234 cw(c103.756,85.931) 103.756,86.36 ; U17.1@103.453,86.234 cw(c103.756,85.931) 103.756,86.36 ; U17.1@103.453,86.234 cw(c103.756,85.931) 103.756,86.36 ; U17.1@103.453,86.486 ccw(c103.756,86.789) 103.756,86.36 ; U17.1@103.453,86.486 ccw(c103.756,86.789) 103.756,86.36 ; U17.1@103.453,86.486 ccw(c103.756,86.789) 103.756,86.36 ; U17.1@103.453,86.486 ccw(c103.756,86.789) 103.756,86.36 ; U17.1@103.601,86.36 cw(c103.601,85.313) v1@104.341,86.053 ; U17.1@103.601,86.36 cw(c103.601,85.313) v1@104.341,86.053 ; U17.1@103.601,86.36 cw(c103.601,85.313) v1@104.341,86.053 ; U17.1@103.601,86.36 cw(c103.601,85.313) v1@104.341,86.053 ; v3@105.439,80.928 cw(c104.897,80.386) 105.664,80.386 ; v3@105.439,80.928 cw(c104.897,80.386) 105.664,80.386 ; v3@105.439,80.928 cw(c104.897,80.386) 105.664,80.386 ; 105.664,80.386 cw(c106.431,80.386) v3@105.889,80.928 ; 105.664,80.386 cw(c106.431,80.386) v3@105.889,80.928 ; 105.664,80.386 cw(c106.431,80.386) v3@105.889,80.928
  Bottom Layer w0.254: v3(105.664,81.153) 104.775,82.042 104.775,85.007 ; v1@104.341,86.053 cw(c103.295,85.007) 104.775,85.007 ; v1@104.341,86.053 cw(c103.295,85.007) 104.775,85.007 ; v1@104.341,86.053 cw(c103.295,85.007) 104.775,85.007 ; v1@104.341,86.053 cw(c103.295,85.007) 104.775,85.007 ; 104.478,85.817 cw(c104.787,85.995) v1(104.521,86.233) ; 104.478,85.817 cw(c104.787,85.995) v1(104.521,86.233) ; 104.478,85.817 cw(c104.787,85.995) v1(104.521,86.233) ; 104.478,85.817 cw(c104.787,85.995) v1(104.521,86.233) ; 104.478,85.817 cw(c104.787,85.995) v1(104.521,86.233) ; 104.478,85.817 cw(c104.787,85.995) v1(104.521,86.233) ; v1@104.517,85.979 cw(c104.512,85.709) 104.745,85.844 ; v1@104.517,85.979 cw(c104.512,85.709) 104.745,85.844 ; v1@104.517,85.979 cw(c104.512,85.709) 104.745,85.844 ; v1@104.517,85.979 cw(c104.512,85.709) 104.745,85.844 ; v1@104.517,85.979 cw(c104.512,85.709) 104.745,85.844 ; v1@104.517,85.979 cw(c104.512,85.709) 104.745,85.844 ; v1(104.521,86.233) cw(c103.908,85.62) 104.775,85.62 ; v1(104.521,86.233) cw(c103.908,85.62) 104.775,85.62 ; v1(104.521,86.233) cw(c103.908,85.62) 104.775,85.62 ; v1(104.521,86.233) cw(c103.908,85.62) 104.775,85.62 ; v1(104.521,86.233) 104.775,85.979 104.775,85.007 ; 104.654,85.512 cw(c105.063,85.749) v1@104.71,86.064 ; 104.654,85.512 cw(c105.063,85.749) v1@104.71,86.064 ; 104.654,85.512 cw(c105.063,85.749) v1@104.71,86.064 ; 104.654,85.512 cw(c105.063,85.749) v1@104.71,86.064 ; 104.654,85.512 cw(c105.063,85.749) v1@104.71,86.064 ; 104.654,85.512 cw(c105.063,85.749) v1@104.71,86.064 ; v1@104.743,86.11 ccw(c104.979,85.979) 104.745,85.844 ; v1@104.743,86.11 ccw(c104.979,85.979) 104.745,85.844 ; v1@104.743,86.11 ccw(c104.979,85.979) 104.745,85.844 ; v1@104.743,86.11 ccw(c104.979,85.979) 104.745,85.844 ; v1@104.743,86.11 ccw(c104.979,85.979) 104.745,85.844 ; v1@104.743,86.11 ccw(c104.979,85.979) 104.745,85.844 ; 105.122,81.695 cw(c104.58,81.153) v3@105.346,81.153 ; 105.122,81.695 ccw(c105.664,82.237) v3@105.664,81.471 ; 105.122,81.695 cw(c104.58,81.153) v3@105.346,81.153 ; 105.122,81.695 ccw(c105.664,82.237) v3@105.664,81.471 ; 105.122,81.695 cw(c104.58,81.153) v3@105.346,81.153 ; 105.122,81.695 ccw(c105.664,82.237) v3@105.664,81.471
V_CHECK_2: U5.1 U17.7 | length 59.2
  Top Layer w0.254: U5.1@67.722,72.701 67.722,74.453 68.707,75.438 109.982,75.438 110.617,76.073 110.617,84.709 110.236,85.09 U17.7@108.204,85.09 ; U17.7@109.041,84.964 cw(c109.344,84.661) 109.344,85.09 ; U17.7@109.041,84.964 cw(c109.344,84.661) 109.344,85.09 ; U17.7@109.041,84.964 cw(c109.344,84.661) 109.344,85.09 ; U17.7@109.041,84.964 cw(c109.344,84.661) 109.344,85.09 ; U17.7@109.041,85.216 ccw(c109.344,85.519) 109.344,85.09 ; U17.7@109.041,85.216 ccw(c109.344,85.519) 109.344,85.09 ; U17.7@109.041,85.216 ccw(c109.344,85.519) 109.344,85.09 ; U17.7@109.041,85.216 ccw(c109.344,85.519) 109.344,85.09
VCC3V3: C1.1 C3.1 C5.2 C9.1 C11.1 C14.1 C18.1 C20.1 C26.1 C29.1 C30.1 C52.2 C54.2 C59.1 C60.1 DS1.1 DS1.6 J7.1 J7.2 J11.1 pad.3@96.647,36.068 R1.1 R2.1 R3.1 R4.1 R5.1 R6.1 R7.1 R8.1 R13.2 R15.1 R17.1 R18.1 R19.1 R20.1 R21.1 R22.1 R57.2 U1.4 U3.8 U5.6 U5.11 U5.21 U5.22 U5.28 U5.50 U5.75 U5.100 U6.2 U6.4 U7.3 U7.7 U7.8 U11.16 U12.16 | length 679.3
  Top Layer w0.254: U5.50@54.172,59.151 57.246,59.151 v1(57.912,59.817) ; U5.28@54.172,70.151 56.943,70.151 v1(57.023,70.231) ; U5.22@57.222,72.701 U5.21@57.722,72.701 57.722,71.564 v1@58.991,70.294 ; v1@58.557,70.046 ccw(c58.323,70.112) 58.494,70.284 ccw(c58.666,70.455) v1@58.732,70.221 ; v1@62.722,70.247 62.722,71.755 ; v1@65.222,70.429 U5.6@65.222,72.701 ; 68.199,56.007 67.722,56.484 U5.75@67.722,57.601 67.722,59.024 66.802,59.944 66.548,59.944 v1(66.421,60.071) ; U5.100@69.272,71.151 67.722,71.151 v1(66.929,70.358) ; 56.217,70.151 ccw(c56.217,71.037) v1@56.843,70.411 ; 56.217,70.151 ccw(c56.217,71.037) v1@56.843,70.411 ; 56.217,70.151 ccw(c56.217,71.037) v1@56.843,70.411 ; 56.603,70.151 cw(c56.603,69.811) v1@56.843,70.051 ; 56.603,70.151 cw(c56.603,69.811) v1@56.843,70.051 ; 56.603,70.151 cw(c56.603,69.811) v1@56.843,70.051 ; 57.478,59.383 cw(c57.912,58.95) v1@57.912,59.563 ; 57.478,59.383 ccw(c57.045,59.817) v1@57.658,59.817 ; 57.478,59.383 cw(c57.912,58.95) v1@57.912,59.563 ; 57.478,59.383 ccw(c57.045,59.817) v1@57.658,59.817 ; 57.478,59.383 cw(c57.912,58.95) v1@57.912,59.563 ; 57.478,59.383 ccw(c57.045,59.817) v1@57.658,59.817 ; 57.572,59.497 cw(c58.001,59.382) v1(57.912,59.817) ; 57.572,59.497 cw(c58.001,59.382) v1(57.912,59.817) ; 57.572,59.497 cw(c58.001,59.382) v1(57.912,59.817) ; 57.592,59.477 ccw(c57.477,59.906) v1(57.912,59.817) ; 57.592,59.477 ccw(c57.477,59.906) v1(57.912,59.817) ; 57.592,59.477 ccw(c57.477,59.906) v1(57.912,59.817) ; 58.008,71.278 cw(c56.707,69.977) v1@58.547,69.977 ; 58.008,71.278 cw(c56.707,69.977) v1@58.547,69.977 ; 58.008,71.278 cw(c56.707,69.977) v1@58.547,69.977 ; 58.411,70.486 ccw(c59.22,70.702) v1(58.801,69.977) ; 58.411,70.486 ccw(c59.22,70.702) v1(58.801,69.977) ; 58.411,70.486 ccw(c59.22,70.702) v1(58.801,69.977) ; 58.442,70.844 cw(c57.575,69.977) v1(58.801,69.977) ; 58.442,70.844 cw(c57.575,69.977) v1(58.801,69.977) ; 58.442,70.844 cw(c57.575,69.977) v1(58.801,69.977) ; v1@58.581,70.104 ccw(c58.05,70.411) 58.642,70.569 ; v1@58.581,70.104 ccw(c58.05,70.411) 58.642,70.569 ; v1@58.581,70.104 ccw(c58.05,70.411) 58.642,70.569 ; 58.642,70.569 ccw(c59.235,70.728) v1@58.928,70.197 ; 58.642,70.569 ccw(c59.235,70.728) v1@58.928,70.197 ; 58.642,70.569 ccw(c59.235,70.728) v1@58.928,70.197 ; 58.875,70.411 cw(c58.442,69.977) v1@59.055,69.977 ; 58.875,70.411 cw(c58.442,69.977) v1@59.055,69.977 ; 58.875,70.411 cw(c58.442,69.977) v1@59.055,69.977 ; v1@62.558,70.411 ccw(c62.163,70.806) 62.722,70.806 ; v1@62.558,70.411 ccw(c62.163,70.806) 62.722,70.806 ; v1@62.558,70.411 ccw(c62.163,70.806) 62.722,70.806 ; 62.722,70.883 ccw(c63.39,70.883) v1@62.918,70.411 ; 62.722,70.883 ccw(c63.39,70.883) v1@62.918,70.411 ; 62.722,70.883 ccw(c63.39,70.883) v1@62.918,70.411 ; v1@64.971,70.538 ccw(c64.366,71.143) 65.222,71.143 ; v1@64.971,70.538 ccw(c64.366,71.143) 65.222,71.143 ; v1@64.971,70.538 ccw(c64.366,71.143) 65.222,71.143 ; 65.222,70.8 ccw(c65.593,70.8) v1@65.331,70.538 ; 65.222,70.8 ccw(c65.593,70.8) v1@65.331,70.538 ; 65.222,70.8 ccw(c65.593,70.8) v1@65.331,70.538 ; v1@66.421,59.817 cw(c66.421,58.591) 67.288,59.458 ; v1@66.421,59.817 cw(c66.421,58.591) 67.288,59.458 ; v1@66.421,59.817 cw(c66.421,58.591) 67.288,59.458 ; v1(66.421,60.071) cw(c66.421,59.458) 66.855,59.891 ; v1(66.421,60.071) cw(c66.421,59.458) 66.855,59.891 ; v1(66.421,60.071) cw(c66.421,59.458) 66.855,59.891 ; v1(66.929,70.358) cw(c67.364,70.269) 67.249,70.698 ; v1(66.929,70.358) ccw(c66.84,70.793) 67.269,70.678 ; v1(66.929,70.358) cw(c67.364,70.269) 67.249,70.698 ; v1(66.929,70.358) ccw(c66.84,70.793) 67.269,70.678 ; v1(66.929,70.358) cw(c67.364,70.269) 67.249,70.698 ; v1(66.929,70.358) ccw(c66.84,70.793) 67.269,70.678 ; v1@66.929,70.612 ccw(c66.929,71.225) 67.363,70.792 ; v1@66.929,70.612 ccw(c66.929,71.225) 67.363,70.792 ; v1@66.929,70.612 ccw(c66.929,71.225) 67.363,70.792 ; v1@67.183,70.358 cw(c67.796,70.358) 67.363,70.792 ; v1@67.183,70.358 cw(c67.796,70.358) 67.363,70.792 ; v1@67.183,70.358 cw(c67.796,70.358) 67.363,70.792
  Top Layer w0.508: C54.2@19.304,61.595 20.273,62.564 v1@20.828,62.564 ; C52.2@20.701,77.978 v1@22.225,77.978 ; v1@29.718,79.756 30.095,79.379 ; v1@29.966,79.844 ccw(c30.565,79.65) 30.02,79.335 ; U11.16@30.095,78.617 30.095,79.379 ; 30.099,49.403 29.464,48.768 29.464,44.577 29.515,44.526 29.515,44.272 30.226,43.561 37.084,43.561 37.719,44.196 37.719,45.212 R57.2@37.592,45.339 ; U3.8@31.607,49.403 32.893,49.403 33.427,49.937 33.427,52.096 34.163,52.832 C30.1@35.306,52.832 ; C29.1@46.99,75.819 48.387,75.819 49.653,74.553 U7.8@49.653,72.898 48.006,72.898 v1(46.99,71.882) 47.244,71.628 U7.7@49.653,71.628 ; v1@47.028,71.761 cw(c47.221,71.143) 47.545,71.703 ; 62.315,111.76 62.315,111.421 63.119,110.617 64.897,110.617 66.548,108.966 R15.1@66.548,107.442 ; 62.442,111.76 ccw(c63.567,111.76) 62.772,110.964 ; C54.2@19.304,62.103 ccw(c19.304,63.329) 20.171,62.462 ; C54.2@19.304,62.103 ccw(c19.304,63.329) 20.171,62.462 ; C54.2@19.304,62.103 ccw(c19.304,63.329) 20.171,62.462 ; C54.2@19.685,61.722 cw(c20.298,61.722) C54.2@19.865,62.156 ; C54.2@19.685,61.722 cw(c20.298,61.722) C54.2@19.865,62.156 ; C54.2@19.685,61.722 cw(c20.298,61.722) C54.2@19.865,62.156 ; 20.661,62.564 ccw(c20.661,63.032) v1@20.992,62.701 ; 20.661,62.564 ccw(c20.661,63.032) v1@20.992,62.701 ; 20.661,62.564 ccw(c20.661,63.032) v1@20.992,62.701 ; C52.2@20.97,77.709 cw(c21.621,77.058) 21.621,77.978 ; C52.2@20.97,77.709 cw(c21.621,77.058) 21.621,77.978 ; C52.2@20.97,77.709 cw(c21.621,77.058) 21.621,77.978 ; C52.2@20.97,78.247 ccw(c21.621,78.898) 21.621,77.978 ; C52.2@20.97,78.247 ccw(c21.621,78.898) 21.621,77.978 ; C52.2@20.97,78.247 ccw(c21.621,78.898) 21.621,77.978 ; 29.661,48.965 cw(c30.607,48.02) U3.8@30.607,49.357 ; 29.661,48.965 cw(c30.607,48.02) U3.8@30.607,49.357 ; 29.661,48.965 cw(c30.607,48.02) U3.8@30.607,49.357 ; 30.095,79.379 cw(c30.44,79.725) 29.968,79.85 ccw(c30.44,79.725) 30.095,79.379 ; U3.8@32.607,49.449 ccw(c32.607,50.251) 33.174,49.684 ; U3.8@32.607,49.449 ccw(c32.607,50.251) 33.174,49.684 ; U3.8@32.607,49.449 ccw(c32.607,50.251) 33.174,49.684 ; 34.259,52.832 cw(c34.259,51.912) 34.91,52.563 ccw(c34.259,51.912) 34.259,52.832 ; 34.259,52.832 ccw(c34.259,53.752) 34.91,53.101 cw(c34.259,53.752) 34.259,52.832 ; R57.2@37.45,45.07 cw(c36.799,44.419) 37.719,44.419 ; R57.2@37.45,45.07 cw(c36.799,44.419) 37.719,44.419 ; R57.2@37.45,45.07 cw(c36.799,44.419) 37.719,44.419 ; 37.719,44.419 cw(c38.639,44.419) R57.2@37.988,45.07 ; 37.719,44.419 cw(c38.639,44.419) R57.2@37.988,45.07 ; 37.719,44.419 cw(c38.639,44.419) R57.2@37.988,45.07 ; 48.037,75.819 cw(c48.037,76.739) 47.386,76.088 ccw(c48.037,76.739) 48.037,75.819 ; 48.037,75.819 ccw(c48.037,74.899) 47.386,75.55 cw(c48.037,74.899) 48.037,75.819 ; 66.548,108.489 cw(c65.628,108.489) 66.279,107.838 ccw(c65.628,108.489) 66.548,108.489 ; 66.548,108.489 ccw(c67.468,108.489) 66.817,107.838 cw(c67.468,108.489) 66.548,108.489 ; 21.866,77.978 ccw(c21.866,78.718) 22.389,78.195 cw(c21.866,78.718) 21.866,77.978 ; v1@29.755,79.793 cw(c28.936,78.974) 30.095,78.974 ccw(c28.936,78.974) v1@29.755,79.793 ; v1@29.797,79.766 cw(c29.614,79.321) 30.095,79.321 ccw(c29.614,79.321) v1@29.797,79.766 ; v1@47.08,71.972 ccw(c47.91,72.802) 47.91,71.628 cw(c47.91,72.802) v1@47.08,71.972
  Top Layer w0.762: v1(21.717,64.262) 28.829,64.262 ; U12.16@28.956,63.372 28.956,64.135 28.829,64.262 ; C60.1@32.385,64.262 28.829,64.262 ; v1(57.912,59.817) 57.912,69.088 v1(58.801,69.977) ; J7.2@59.403,97.757 cw(c58.709,97.063) 59.69,97.063 cw(c60.671,97.063) J7.2@59.977,97.757 ; 68.199,56.007 68.961,55.245 v1(72.39,55.245) ; 28.956,63.534 ccw(c29.609,63.534) U12.16@29.147,63.072 ; 28.956,63.534 ccw(c29.609,63.534) U12.16@29.147,63.072 ; 28.956,63.534 ccw(c29.609,63.534) U12.16@29.147,63.072 ; 31.719,64.262 ccw(c31.719,65.309) 32.459,64.569 cw(c31.719,65.309) 31.719,64.262
  Top Layer w1.016: C59.1@29.464,81.915 31.877,81.915 35.255,78.537 35.255,64.059 ; C60.1@32.385,64.262 35.052,64.262 35.255,64.059 ; C30.1@35.306,52.832 35.306,64.008 35.255,64.059 ; v4(41.148,70.739) 40.64,71.247 40.64,77.089 v1(41.148,77.597) ; v4@41.58,70.358 U7.3@43.053,70.358 ; v4@41.238,70.829 ccw(c42.374,71.965) 42.374,70.358 cw(c42.374,71.965) v4@41.238,70.829 ; v4@41.238,70.829 cw(c42.681,72.272) 40.64,72.272 ccw(c42.681,72.272) v4@41.238,70.829 ; 40.64,76.677 cw(c42.068,76.677) 41.058,77.687 ccw(c42.068,76.677) 40.64,76.677 ; 40.64,76.879 cw(c41.635,76.879) 41.077,77.702 ccw(c41.635,76.879) 40.64,76.879
  Top Layer w1.27: 29.464,80.01 C59.1@29.464,81.915 ; R17.1@93.98,19.177 R18.1@93.98,21.844 R19.1@93.98,24.511 R20.1@93.98,27.178 R21.1@93.98,29.845 R22.1@93.98,32.512 v1(93.98,35.941) ; 29.464,80.19 ccw(c30.152,80.19) 29.665,79.703 cw(c30.152,80.19) 29.464,80.19
  Top Layer w1.524: v4(43.688,79.629) 46.355,79.629 48.26,81.534 48.26,89.662 49.53,90.932 61.734,90.932 ; U6.2@56.515,114.808 U6.4@62.315,114.808 ; J7.2@59.69,98.044 59.69,97.915 59.403,97.627 59.63,97.399 59.63,93.913 61.734,91.809 61.734,90.932 ; U6.4@62.273,115.552 ccw(c62.722,117.227) 63.589,115.725 ; 62.315,111.76 U6.4@62.315,114.808 ; v4(81.407,90.932) 76.911,90.932 76.657,90.678 76.657,86.436 R13.2@76.2,85.979 67.437,85.979 64.768,88.648 U1.4@61.734,88.648 61.734,90.932 ; DS1.6@88.138,107.442 86.487,107.442 84.455,109.474 84.455,116.713 83.566,117.602 DS1.1@80.518,117.602 80.264,117.348 C26.1@71.374,117.348 C20.1@68.707,117.348 66.421,117.348 C18.1@65.405,116.332 63.839,116.332 ; U6.4@62.315,114.808 63.839,116.332 ; U6.4@62.315,115.546 ccw(c62.315,117.328) 63.575,116.068 ; U6.4@62.315,115.546 ccw(c62.315,117.328) 63.575,116.068 ; U6.4@62.315,115.546 ccw(c62.315,117.328) 63.575,116.068 ; U6.4@62.315,115.546 ccw(c62.315,117.328) 63.575,116.068 ; U6.4@62.325,115.545 ccw(c62.746,117.115) 63.558,115.707 ; U6.4@62.325,115.545 ccw(c62.746,117.115) 63.558,115.707 ; U6.4@62.325,115.545 ccw(c62.746,117.115) 63.558,115.707 ; U6.4@62.325,115.545 ccw(c62.746,117.115) 63.558,115.707 ; U6.4@62.325,115.545 ccw(c62.746,117.115) 63.558,115.707 ; U6.4@62.325,115.545 ccw(c62.746,117.115) 63.558,115.707 ; U6.4@62.325,115.545 ccw(c62.746,117.115) 63.558,115.707 ; U6.4@62.342,115.481 cw(c64.396,113.427) C18.1@64.396,116.332 ; U6.4@62.342,115.481 cw(c64.396,113.427) C18.1@64.396,116.332 ; U6.4@62.342,115.481 cw(c64.396,113.427) C18.1@64.396,116.332 ; U6.4@62.744,115.237 cw(c65.055,112.925) C18.1@65.055,116.194 ; U6.4@62.744,115.237 cw(c65.055,112.925) C18.1@65.055,116.194 ; U6.4@62.744,115.237 cw(c65.055,112.925) C18.1@65.055,116.194 ; U6.4@62.744,115.237 cw(c65.055,112.925) C18.1@65.055,116.194 ; 63.839,116.332 ccw(c63.839,114.592) 62.348,115.488 cw(c63.839,114.592) 63.839,116.332 ; C18.1@65.853,116.234 cw(c68.541,113.546) C20.1@68.541,117.348 ; C18.1@65.853,116.234 cw(c68.541,113.546) C20.1@68.541,117.348 ; C18.1@65.853,116.234 cw(c68.541,113.546) C20.1@68.541,117.348 ; C18.1@65.853,116.234 cw(c68.541,113.546) C20.1@68.541,117.348 ; C18.1@65.893,116.332 cw(c67.071,116.332) C18.1@66.238,117.165 ; C18.1@65.893,116.332 cw(c67.071,116.332) C18.1@66.238,117.165 ; C18.1@65.893,116.332 cw(c67.071,116.332) C18.1@66.238,117.165 ; C18.1@65.893,116.332 cw(c67.071,116.332) C18.1@66.238,117.165 ; R13.2@76.29,86.016 ccw(c75.403,86.903) 76.657,86.903 cw(c75.403,86.903) R13.2@76.29,86.016
  Bottom Layer w0.508: v1(22.479,78.105) 24.257,79.883 v1(29.845,79.883) ; v1(57.912,59.817) C1.1@57.912,60.96 ; 66.548,60.452 C3.1@66.548,61.849 ; C1.1@57.643,60.691 cw(c56.992,60.04) v1@57.912,60.04 ; C1.1@57.643,60.691 cw(c56.992,60.04) v1@57.912,60.04 ; C1.1@57.643,60.691 cw(c56.992,60.04) v1@57.912,60.04 ; v1@57.802,59.881 ccw(c57.366,60.132) 57.852,60.263 ; v1@57.802,59.881 ccw(c57.366,60.132) 57.852,60.263 ; v1@57.802,59.881 ccw(c57.366,60.132) 57.852,60.263 ; v1@57.802,59.881 ccw(c57.366,60.132) 57.852,60.263 ; v1@57.802,59.881 ccw(c57.366,60.132) 57.852,60.263 ; v1@57.802,59.881 ccw(c57.366,60.132) 57.852,60.263 ; v1@57.912,60.04 cw(c58.832,60.04) C1.1@58.181,60.691 ; v1@57.912,60.04 cw(c58.832,60.04) C1.1@58.181,60.691 ; v1@57.912,60.04 cw(c58.832,60.04) C1.1@58.181,60.691 ; 57.972,60.263 ccw(c58.458,60.132) v1@58.022,59.881 ; 57.972,60.263 ccw(c58.458,60.132) v1@58.022,59.881 ; 57.972,60.263 ccw(c58.458,60.132) v1@58.022,59.881 ; 57.972,60.263 ccw(c58.458,60.132) v1@58.022,59.881 ; 57.972,60.263 ccw(c58.458,60.132) v1@58.022,59.881 ; 57.972,60.263 ccw(c58.458,60.132) v1@58.022,59.881 ; C3.1@66.279,61.58 cw(c65.628,60.929) 66.548,60.929 ; C3.1@66.279,61.58 cw(c65.628,60.929) 66.548,60.929 ; C3.1@66.279,61.58 cw(c65.628,60.929) 66.548,60.929 ; v1@66.331,60.161 ccw(c65.808,60.684) 66.548,60.684 ; v1@66.331,60.161 ccw(c65.808,60.684) 66.548,60.684 ; v1@66.331,60.161 ccw(c65.808,60.684) 66.548,60.684 ; 66.548,60.929 cw(c67.468,60.929) C3.1@66.817,61.58 ; 66.548,60.929 cw(c67.468,60.929) C3.1@66.817,61.58 ; 66.548,60.929 cw(c67.468,60.929) C3.1@66.817,61.58
  Bottom Layer w0.762: v1(21.082,62.611) 21.717,63.246 v1(21.717,64.262) ; v1(72.39,55.245) 72.39,56.388 73.279,57.277 82.296,57.277
  Bottom Layer w1.016: v4(41.148,70.739) 41.529,70.358 46.101,70.358 ; v1(46.99,71.882) 46.99,71.247 ; R8.1@48.768,47.625 48.641,47.498 48.641,43.561 49.53,42.672 54.61,42.672 ; R7.1@53.848,47.625 53.721,47.498 53.721,43.561 54.61,42.672 ; v1@57.09,70.164 57.09,69.967 58.039,69.018 C9.1@58.039,68.58 ; v1(58.801,69.977) 58.801,68.58 ; 62.738,69.85 C5.2@62.738,68.58 ; v1(65.151,70.358) C14.1@65.151,68.58 ; v1@66.749,70.178 C14.1@65.151,68.58 ; v1(72.39,55.245) 72.39,47.625 71.247,46.482 62.611,46.482 58.801,42.672 54.61,42.672 ; 46.101,70.358 46.99,71.247 ; 46.101,70.358 47.879,68.58 C9.1@58.039,68.58 ; 46.99,71.247 ccw(c46.565,71.672) 47.104,71.938 cw(c46.565,71.672) 46.99,71.247 ; C9.1@58.039,68.58 58.801,68.58 ; 58.801,68.58 C11.1@60.325,68.58 C5.2@62.738,68.58 ; C5.2@62.738,68.58 C14.1@65.151,68.58 ; v4@41.238,70.829 ccw(c42.374,71.965) 42.374,70.358 cw(c42.374,71.965) v4@41.238,70.829 ; 46.758,71.015 ccw(c45.891,71.882) 47.117,71.882 cw(c45.891,71.882) 46.758,71.015 ; 57.603,69.454 cw(c56.856,68.707) 57.912,68.707 ccw(c56.856,68.707) 57.603,69.454
  Bottom Layer w1.27: J11.1@29.337,87.535 29.337,80.391 ; R1.1@100.838,18.923 R2.1@100.838,21.463 R3.1@100.838,24.003 R4.1@100.838,26.543 R5.1@100.838,29.083 R6.1@100.838,31.623 100.838,36.195 ; 29.337,80.391 ccw(c30.226,80.391) 29.693,79.68 cw(c30.226,80.391) 29.337,80.391 ; 29.337,80.496 ccw(c30.458,80.496) 29.665,79.703 cw(c30.458,80.496) 29.337,80.496
  Bottom Layer w1.524: 29.337,80.391 v1(29.845,79.883) 30.099,79.629 40.64,79.629 ; v1(41.148,77.597) 40.64,78.105 40.64,79.629 ; v4(43.688,79.629) 40.64,79.629 ; v4(81.407,90.932) 82.296,90.932 ; DS1.6@88.138,107.442 86.106,107.442 84.684,106.02 84.684,92.431 83.185,90.932 82.296,90.932 ; 100.838,36.195 91.694,36.195 82.296,45.593 82.296,57.277 82.296,90.932 ; v4@81.426,91.058 cw(c81.269,90.043) 82.296,90.043 ; v4@81.426,91.058 cw(c81.269,90.043) 82.296,90.043 ; v4@81.426,91.058 cw(c81.269,90.043) 82.296,90.043 ; v4@81.497,91.022 cw(c79.567,89.092) 82.296,89.092 ; v4@81.497,91.022 cw(c79.567,89.092) 82.296,89.092 ; v4@81.497,91.022 cw(c79.567,89.092) 82.296,89.092
  other v1: 62.738,70.231
pads on no net: J7.11 J7.17 J7.19 J9.0 J10.0 J11.0 J11.13 J11.14 J13.0 K1.0 K2.0 K3.0 U1.1 U5.13 U5.73 U9.9 U12.11 U12.12 U12.13 U12.14 U16.3 U16.18
copper on no net:
  other v1: 23.495,39.37

## Polygon pours and split planes (outlines as drawn)
GND on Top Layer "BottomLayer-No Net" (hatched 90Degree grid 0.508 track 0.203, remove dead copper, pour order 11): 6.35,120.904 85.09,120.904 85.09,89.027 105.918,89.027 105.918,76.835 105.791,76.835 104.826,75.87 104.826,72.949 104.775,72.898 104.648,73.025 88.138,73.025 88.138,39.649 87.884,39.395 89.789,37.49 89.789,37.465 121.158,37.465 121.158,6.223 113.792,6.223 113.665,6.35 113.538,6.223 113.538,-0.762 6.35,-0.762 6.35,6.223 6.35,6.35 -1.016,6.35 -1.016,113.792 6.35,113.792 6.35,120.904
AGND on Top Layer "BottomLayer-No Net" (hatched 90Degree grid 0.508 track 0.203, remove dead copper, pour order 20): 85.09,121.031 113.665,121.031 113.665,113.538 120.523,113.538 120.65,113.665 120.396,113.411 120.396,39.243 88.011,39.243 87.757,39.497 87.884,39.624 87.884,72.898 104.775,72.898 105.156,72.517 104.902,72.771 104.902,87.884 104.902,89.281 104.775,89.154 85.217,89.154 85.217,120.777 85.09,120.904
GND on Bottom Layer "BottomLayer-No Net" (hatched 90Degree grid 0.508 track 0.203, remove dead copper, pour order 9): 6.35,120.904 85.09,120.904 85.09,88.646 85.344,88.392 86.106,89.154 105.918,89.154 105.918,76.952 105.029,76.063 104.775,75.809 104.775,73.025 104.639,72.889 88.138,72.889 88.138,40.132 87.884,39.878 87.884,39.497 89.281,38.1 89.789,37.592 120.904,37.592 121.031,37.592 121.158,37.465 121.158,6.35 113.665,6.35 113.538,6.223 113.665,6.096 113.665,-0.889 6.477,-0.889 6.35,-0.762 6.35,6.35 -1.016,6.35 -1.016,113.665 6.35,113.665 6.35,120.904
AGND on Bottom Layer "BottomLayer-No Net" (hatched 90Degree grid 0.508 track 0.203, remove dead copper, pour order 24): 85.217,120.904 113.665,120.904 113.665,113.665 121.031,113.665 121.158,113.538 121.158,38.989 88.011,38.989 88.138,39.116 88.138,72.898 104.902,72.898 105.029,73.025 105.029,88.646 86.106,88.646 85.471,89.281

## Keep-outs
Keep-Out Layer:
  lines w0.254: -1.016,-0.762 -1.016,119.126 -1.016,120.904 121.158,120.904 121.158,-0.762 -1.016,-0.762

## Other copper
Top Layer:
  rectangle net +24V: 26.67,93.472 29.972,96.393
  rectangle net GND: 1.016,103.378 22.606,107.188
  rectangle net NetC7_1: 14.986,113.284 25.908,119.507
  rectangle net +24VIN: 8.382,107.95 12.7,119.634
  rectangle net +24VIN: 0.635,108.204 12.065,112.014
  rectangle net GND: 2.032,93.853 16.764,97.536

## Silkscreen, mask and mechanical layers (free items; w line width, h text height)
Top Overlay:
  lines w0.254: 0.127,6.35 5.715,6.35 6.35,6.35 6.35,5.461 6.35,0.127 ; 0.127,113.665 6.35,113.665 6.35,120.015 ; 113.665,0.127 113.665,6.35 120.015,6.35 ; 113.665,119.888 113.665,113.665 120.015,113.665
  text "24V" at 10.668,109.982 h0.76
  text "GND" at 10.668,103.759 h0.76
  text "24V" at 57.658,102.616 h0.76
  text "5V" at 63.373,102.616 h0.76
  text "3.3V" at 68.961,102.616 h0.76
  text "24V" at 10.795,100.33 h0.76
  text "GND" at 10.922,93.98 h0.76
  text "北京维冠" at 64.008,76.581 h2.54
  text "控制板" at 73.914,76.581 h2.54
  text "GND" at 70.104,38.354 h0.76
  text "3.3V" at 95.885,37.719 h0.76
  text "5V" at 115.443,12.954 h0.76
  text "24V" at 0.889,8.001 h0.76
Mechanical 13:
  lines w0.254: 120.269,-0.762 121.158,-0.762 121.158,-0.508
Mechanical 15:
  lines w0.254: 0,-0.762 120.015,-0.762 ; 0.762,-0.762 -0.889,-0.762 -1.016,-0.635 -1.016,116.713 -1.016,120.904 118.745,120.904 121.158,120.904 121.158,-0.762 ; 119.634,-0.762 121.158,-0.762 ; 120.65,-0.762 121.158,-0.762

## Dimensions
-1.016,-0.762 to -1.016,120.904 on Top Overlay
-1.016,-0.762 to 121.158,-0.762 on Top Overlay
117,117 to 3,117 on Top Overlay
117,3 to 117,117 on Top Overlay